# Altium PCB main board_PCB.PcbDoc
Units mm, origin at the board's own origin, x right, y up, seen from the top; angles counter-clockwise.
Board outline 152.4 x 101.6 mm, 2 copper layers (Top Layer, Bottom Layer); 106 components, 93 nets, 324 pads, 27 vias.
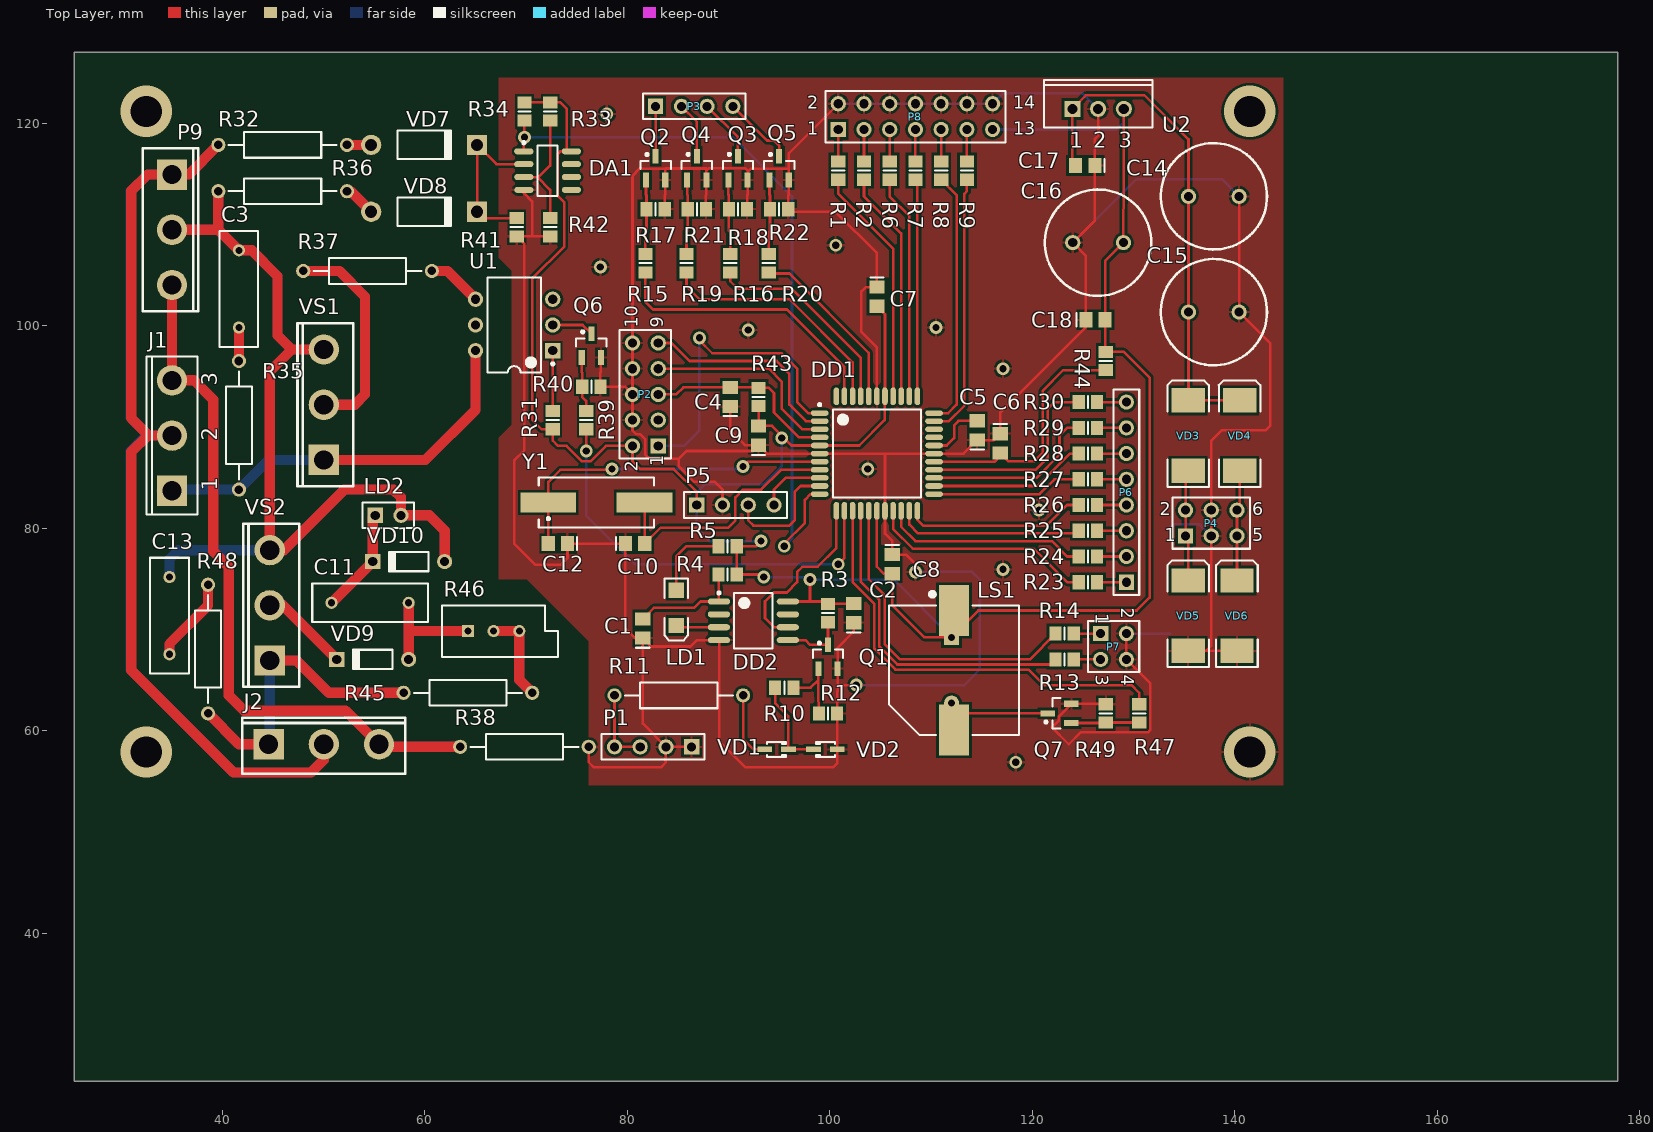
[diagram p0: Top Layer view]
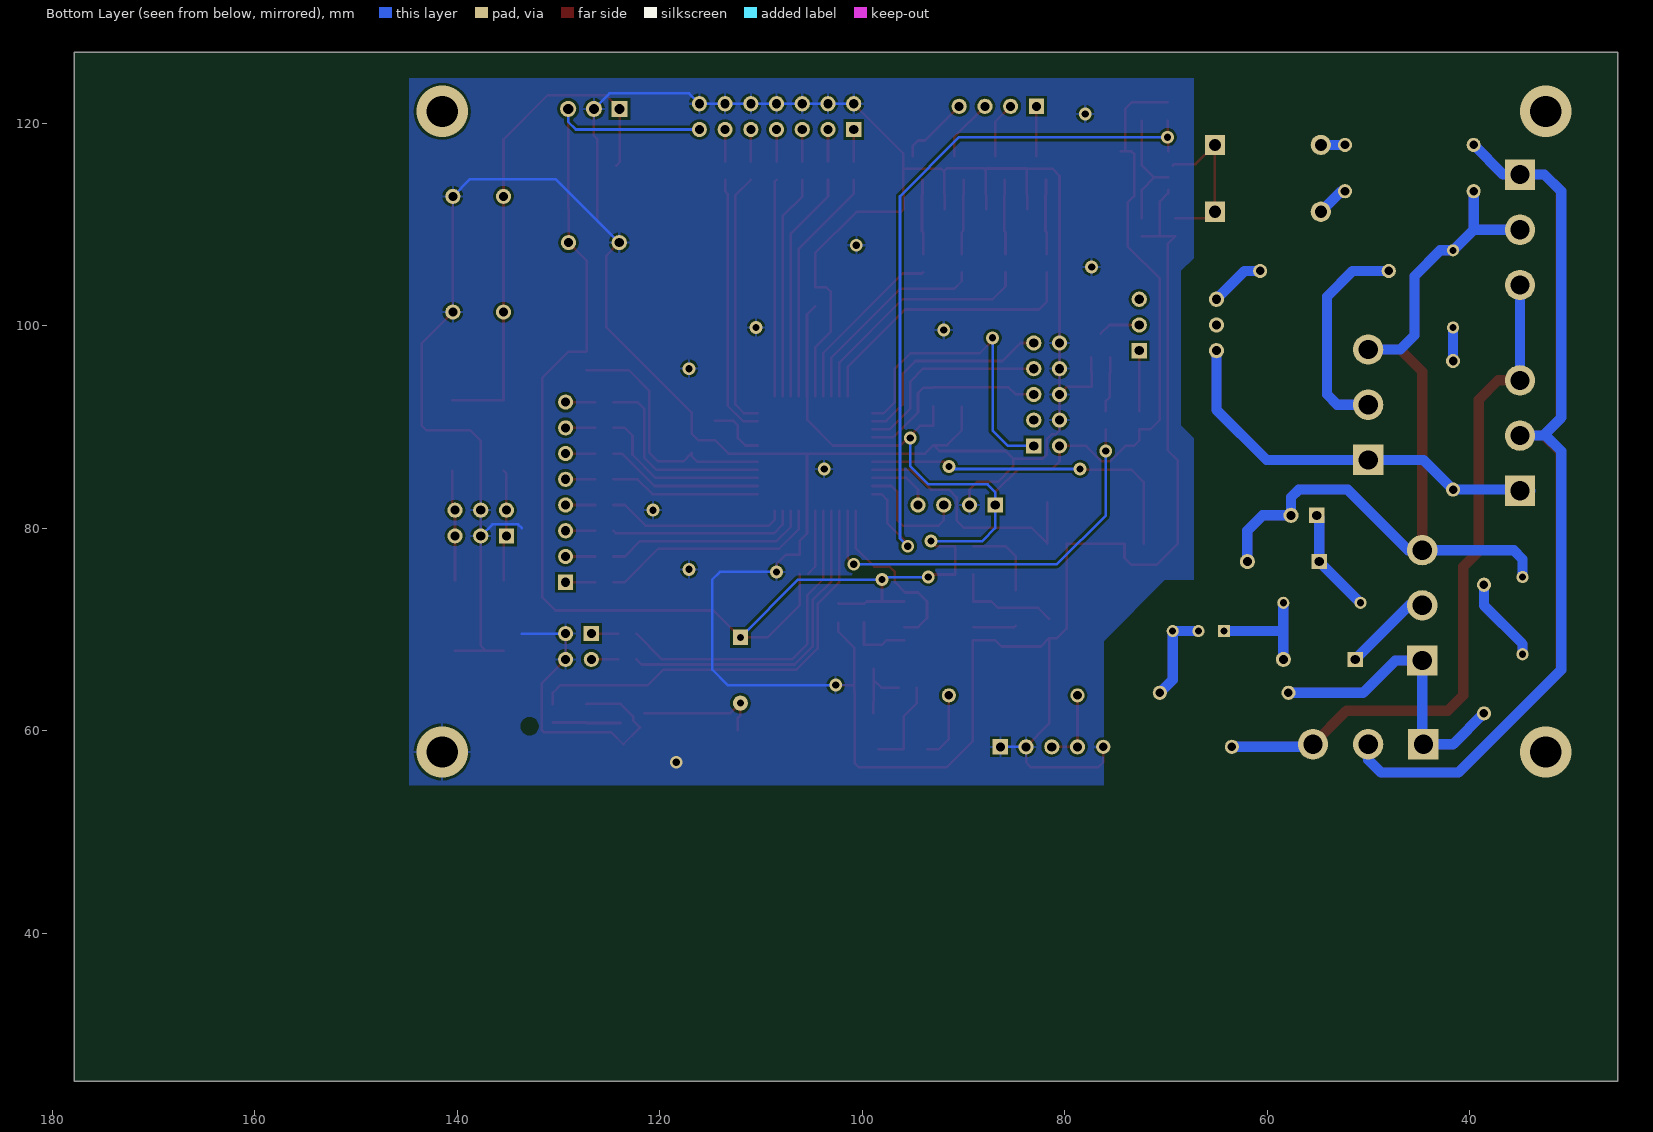
[diagram p1: Bottom Layer view, seen from below]

## Layer stack, top to bottom
Top Layer: signal copper 0.0356
Dielectric: dielectric 0.32, FR-4, Dk 4.8
Bottom Layer: signal copper 0.0356

## Board outline
25.4,25.4 177.8,25.4 177.8,127 25.4,127

## Design rules (kind name [scope] priority, off if disabled: settings)
Clearance [All] p1: gap=0.254
PolygonConnect [All] p1: connectstyle=Relief reliefconductorwidth=0.254 reliefentries=4 polygonreliefangle="90 Angle" airgapwidth=0.254
RoutingVias [All] p1: holewidth=0.711 width=1.27 viastyle="Through Hole" minholewidth=0.711 minwidth=1.27 maxholewidth=0.711 maxwidth=1.27
SilkscreenOverComponentPads [All] p1: minsilkscreentomaskgap=0.254
SolderMaskExpansion [All] p1: expansion=0.102
Width "Schematic Width Constraint_14" [InNet('NetR32_2')] p1: maxlimit=1.27 minlimit=0.254 preferedwidth=1.016 bottomlayer_maxwidth=1.016 minimp=50.000000 maximp=50.000000 favimp=50.000000
Width "Schematic Width Constraint_13" [InNet('NetR36_2')] p2: maxlimit=1.27 minlimit=0.254 preferedwidth=1.016 bottomlayer_maxwidth=1.016 minimp=50.000000 maximp=50.000000 favimp=50.000000
Width "Schematic Width Constraint_12" [InNet('NetVD9_2')] p3: maxlimit=1.27 minlimit=0.254 preferedwidth=1.016 bottomlayer_maxwidth=1.016 minimp=50.000000 maximp=50.000000 favimp=50.000000
Width "Schematic Width Constraint_11" [InNet('NetC3_2')] p4: maxlimit=1.27 minlimit=0.254 preferedwidth=1.016 bottomlayer_maxwidth=1.016 minimp=50.000000 maximp=50.000000 favimp=50.000000
Width "Schematic Width Constraint_10" [InNet('NetC11_1')] p5: maxlimit=1.27 minlimit=0.254 preferedwidth=1.016 bottomlayer_maxwidth=1.016 minimp=50.000000 maximp=50.000000 favimp=50.000000
Width "Schematic Width Constraint_9" [InNet('NetC11_2')] p6: maxlimit=1.27 minlimit=0.254 preferedwidth=1.016 bottomlayer_maxwidth=1.016 minimp=50.000000 maximp=50.000000 favimp=50.000000
Width "Schematic Width Constraint_8" [InNet('NetC13_2')] p7: maxlimit=1.27 minlimit=0.254 preferedwidth=1.016 bottomlayer_maxwidth=1.016 minimp=50.000000 maximp=50.000000 favimp=50.000000
Width "Schematic Width Constraint_7" [InNet('NetJ1_1')] p8: maxlimit=1.27 minlimit=0.254 preferedwidth=1.016 bottomlayer_maxwidth=1.016 minimp=50.000000 maximp=50.000000 favimp=50.000000
Width "Schematic Width Constraint_6" [InNet('NetJ1_3')] p9: maxlimit=1.27 minlimit=0.254 preferedwidth=1.016 bottomlayer_maxwidth=1.016 minimp=50.000000 maximp=50.000000 favimp=50.000000
Width "Schematic Width Constraint_5" [InNet('NetJ2_1')] p10: maxlimit=1.27 minlimit=0.254 preferedwidth=1.016 bottomlayer_maxwidth=1.016 minimp=50.000000 maximp=50.000000 favimp=50.000000
Width "Schematic Width Constraint_4" [InNet('NetR37_1')] p11: maxlimit=1.27 minlimit=0.254 preferedwidth=1.016 bottomlayer_maxwidth=1.016 minimp=50.000000 maximp=50.000000 favimp=50.000000
Width "Schematic Width Constraint_3" [InNet('NetR37_2')] p12: maxlimit=1.27 minlimit=0.254 preferedwidth=1.016 bottomlayer_maxwidth=1.016 minimp=50.000000 maximp=50.000000 favimp=50.000000
Width "Schematic Width Constraint_2" [InNet('NetR45_1')] p13: maxlimit=1.27 minlimit=0.254 preferedwidth=1.016 bottomlayer_maxwidth=1.016 minimp=50.000000 maximp=50.000000 favimp=50.000000
Width "Schematic Width Constraint_1" [InNet('AC_2')] p14: maxlimit=1.27 minlimit=0.254 preferedwidth=1.016 bottomlayer_maxwidth=1.016 minimp=50.000000 maximp=50.000000 favimp=50.000000
Width "Schematic Width Constraint" [InNet('AC_1')] p15: maxlimit=1.27 minlimit=0.254 preferedwidth=1.016 bottomlayer_maxwidth=1.016 minimp=50.000000 maximp=50.000000 favimp=50.000000
Width [All] p16: maxlimit=0.254 minlimit=0.254 preferedwidth=0.254
27 further rules are at their usual default settings.

## Components (designator, comment, footprint, x,y, rotation, side; value= is the part's Value field where it differs from the comment)
C1 "C0805" 0805 81.534,70.104 r90 top
C2 "C0805" 0805 102.362,71.628 r90 top
C3 "Cap" RAD-0.3 41.656,103.632 r270 top
C4 "C0805" 0805 90.17,92.964 r90 top
C5 "C0805" 0805 114.554,89.662 r90 top
C6 "C0805" 0805 116.84,88.392 r270 top
C7 "C0805" 0805 104.648,102.87 r270 top
C8 "C0805" 0805 106.172,76.454 r270 top
C9 "C0805" 0805 92.964,89.154 r90 top
C10 "C0805" 0805 80.772,78.486 r0 top
C11 "Cap" RAD-0.3 54.61,72.644 r0 top
C12 "C0805" 0805 73.152,78.486 r180 top
C13 "Cap" RAD-0.3 34.798,71.374 r270 top
C14 "Cap Pol1" RB5-10.5 137.922,112.776 r0 top
C15 "Cap Pol1" RB5-10.5 137.922,101.346 r0 top
C16 "Cap Pol1" RB5-10.5 126.492,108.204 r180 top
C17 "C0805" 0805 125.222,115.824 r180 top
C18 "C0805" 0805 126.238,100.584 r0 top
DA1 "LM393D" SO8_L 72.136,115.316 r0 top
DD1 "ATmega32A-AU" 44A_N 104.648,87.376 r0 top
DD2 "ATtiny25-20SU" 8S2_N 92.456,70.866 r0 top
J1 "Plug AC Female" SUPER-247 35.052,89.154 r90 top
J2 "Plug AC Female" Super-TO-247AC 50.038,58.674 r0 top
LD1 "LED2" 3.2X1.6X1.1 84.836,72.136 r270 top
LD2 "LED1" HDR1X2 55.118,81.28 r0 top
LS1 "Buzzer" ABSM-1574 112.268,71.882 r270 top
P1 "Header 4" HDR1X4 86.36,58.42 r180 top
P2 "Header 5X2" HDR2X5 83.058,88.138 r90 top
P3 "Header 4" HDR1X4 82.804,121.666 r0 top
P4 "Header 3X2" HDR2X3 135.128,79.248 r0 top
P5 "Header 4" HDR1X4 86.868,82.296 r0 top
P6 "Header 8" HDR1X8 129.286,74.676 r90 top
P7 "Header 2X2" HDR2X2 126.746,69.596 r270 top
P8 "Header 7X2" HDR2X7 100.838,119.38 r0 top
P9 "Plug AC Male" Super-TO-247AC 35.052,109.474 r270 top
Q1 "QNPN" SOT23_M 99.822,67.31 r90 top
Q2 "QNPN" SOT23_M 82.804,115.57 r90 top
Q3 "QNPN" SOT23_M 90.932,115.57 r90 top
Q4 "QNPN" SOT23_M 86.868,115.57 r90 top
Q5 "QNPN" SOT23_M 94.996,115.57 r90 top
Q6 "QNPN" SOT23_M 76.454,98.044 r90 top
Q7 "QNPN" SOT23_M 122.682,61.722 r180 top
R1 "Res2" 6-0805_N 100.838,115.316 r270 top
R2 "Res2" 6-0805_N 103.378,115.316 r270 top
R3 "Res2" 6-0805_N 99.822,71.628 r90 top
R4 "Res2" 6-0805_N 89.916,75.438 r0 top
R5 "Res2" 6-0805_N 89.916,78.232 r0 top
R6 "Res2" 6-0805_N 105.918,115.316 r270 top
R7 "Res2" 6-0805_N 108.458,115.316 r270 top
R8 "Res2" 6-0805_N 110.998,115.316 r270 top
R9 "Res2" 6-0805_N 113.538,115.316 r270 top
R10 "Res2" 6-0805_N 95.504,64.262 r0 top
R11 "Res Semi" AXIAL-0.5 85.09,63.5 r0 top
R12 "Res2" 6-0805_N 99.822,61.722 r180 top
R13 "Res2" 6-0805_N 123.19,67.056 r0 top
R14 "Res2" 6-0805_N 123.19,69.596 r0 top
R15 "Res2" 6-0805_N 81.788,106.172 r90 top
R16 "Res2" 6-0805_N 90.17,106.172 r90 top
R17 "Res2" 6-0805_N 82.804,111.506 r180 top
R18 "Res2" 6-0805_N 90.932,111.506 r180 top
R19 "Res2" 6-0805_N 85.852,106.172 r90 top
R20 "Res2" 6-0805_N 93.98,106.172 r90 top
R21 "Res2" 6-0805_N 86.868,111.506 r180 top
R22 "Res2" 6-0805_N 94.996,111.506 r180 top
R23 "Res2" 6-0805_N 125.476,74.676 r0 top
R24 "Res2" 6-0805_N 125.476,77.216 r0 top
R25 "Res2" 6-0805_N 125.476,79.756 r0 top
R26 "Res2" 6-0805_N 125.476,82.296 r0 top
R27 "Res2" 6-0805_N 125.476,84.836 r0 top
R28 "Res2" 6-0805_N 125.476,87.376 r0 top
R29 "Res2" 6-0805_N 125.476,89.916 r0 top
R30 "Res2" 6-0805_N 125.476,92.456 r0 top
R31 "Res2" 6-0805_N 72.644,90.678 r90 top
R32 "Res Semi" AXIAL-0.5 45.974,117.856 r0 top
R33 "Res2" 6-0805_N 72.39,121.158 r90 top
R34 "Res2" 6-0805_N 69.85,121.158 r90 top
R35 "Res Semi" AXIAL-0.5 41.656,90.17 r270 top
R36 "Res Semi" AXIAL-0.5 45.974,113.284 r0 top
R37 "Res Semi" AXIAL-0.5 54.356,105.41 r0 top
R38 "Res Semi" AXIAL-0.5 69.85,58.42 r180 top
R39 "Res2" 6-0805_N 75.946,90.678 r90 top
R40 "Res2" 6-0805_N 76.454,93.98 r180 top
R41 "Res2" 6-0805_N 69.088,109.728 r90 top
R42 "Res2" 6-0805_N 72.39,109.728 r90 top
R43 "Res2" 6-0805_N 92.964,92.964 r90 top
R44 "Res2" 6-0805_N 127.254,96.52 r90 top
R45 "Res Semi" AXIAL-0.5 64.262,63.754 r180 top
R46 "RPot" VR5 66.802,69.85 r0 top
R47 "Res2" 6-0805_N 130.556,61.722 r270 top
R48 "Res Semi" AXIAL-0.5 38.608,68.072 r270 top
R49 "Res2" 6-0805_N 127.254,61.722 r270 top
U1 "MOC3051" DIP-6 68.834,100.076 r180 top
U2 "µA7805CKC" KC03 126.492,121.412 r0 top
VD1 "BAS316" SOD-323 94.742,58.166 r0 top
VD2 "BAS316" SOD-323 99.568,58.166 r180 top
VD3 "ES3" SMC 135.382,89.154 r90 top
VD4 "ES3" SMC 140.462,89.154 r90 top
VD5 "ES3" SMC 135.382,71.374 r90 top
VD6 "ES3" SMC 140.208,71.374 r90 top
VD7 "SF16" DO-41 59.944,117.856 r0 top
VD8 "SF16" DO-41 59.944,111.252 r0 top
VD9 "Diode 1N4148" DO-35 54.864,67.056 r180 top
VD10 "Diode 1N4148" DO-35 58.42,76.708 r180 top
VS1 "SCR" Super-TO-247AC 50.038,92.202 r90 top
VS2 "SCR" Super-TO-247AC 44.704,72.39 r90 top
Y1 "HC49/4H_SMX" HC49/4H_SMX 76.962,82.55 r0 top

## Footprints (in the part's own frame and the unit in brackets; to place one, negate y for a bottom-side part, rotate by r counter-clockwise, add the part's x,y. Pads: shape width x height; smd on the part's side, far side on the other; paste and mask are expansions set on the pad)
3.2X1.6X1.1 [mm] "SMT LED; 2 Flat Leads"
  rect 1.5x1.5 smd: 1(-1.75,0) 2(1.75,0)
  silkscreen extent -2.9,-1.15 3.2,1.15
6-0805_N [mm] "Chip Resistor, Body 2.0x1.2mm, IPC Medium Density"
  rect 1.2x1.4 smd: 1(-0.9,0) 2(0.9,0)
  silkscreen extent 0,-0.6 0,0.6, body extent -1.07,-0.7 1.07,0.7, height 0.7
8S2_N [mm] "SOP, 8-Leads, Body 5.3x5.3mm, Pitch 1.27mm, IPC Medium Density"
  oval 2.2x0.6 smd: 1(-3.4,1.905) 2(-3.4,0.635) 3(-3.4,-0.635) 4(-3.4,-1.905) 5(3.4,-1.905) 6(3.4,-0.635) 7(3.4,0.635) 8(3.4,1.905)
  silkscreen extent -3.52,-2.75 1.9,2.88, body extent -2.73,-2.75 2.73,2.75, height 2.16
44A_N [mm] "Thin QFP, 44-Leads, Body 10x10mm, Pitch 0.8mm, IPC Medium Density"
  oval 1.75x0.55 smd: 1(-5.65,4) 2(-5.65,3.2) 3(-5.65,2.4) 4(-5.65,1.6) 5(-5.65,0.8) 6(-5.65,0) 7(-5.65,-0.8) 8(-5.65,-1.6) 9(-5.65,-2.4) 10(-5.65,-3.2) 11(-5.65,-4) 23(5.65,-4) 24(5.65,-3.2) 25(5.65,-2.4) 26(5.65,-1.6) 27(5.65,-0.8) 28(5.65,0) 29(5.65,0.8) 30(5.65,1.6) 31(5.65,2.4) 32(5.65,3.2) 33(5.65,4)
  oval 0.55x1.75 smd: 12(-4,-5.65) 13(-3.2,-5.65) 14(-2.4,-5.65) 15(-1.6,-5.65) 16(-0.8,-5.65) 17(0,-5.65) 18(0.8,-5.65) 19(1.6,-5.65) 20(2.4,-5.65) 21(3.2,-5.65) 22(4,-5.65) 34(4,5.65) 35(3.2,5.65) 36(2.4,5.65) 37(1.6,5.65) 38(0.8,5.65) 39(0,5.65) 40(-0.8,5.65) 41(-1.6,5.65) 42(-2.4,5.65) 43(-3.2,5.65) 44(-4,5.65)
  silkscreen extent -5.77,-4.35 4.35,4.95, body extent -5,-5 5,5, height 1.2
0805 [mm] "Chip Capacitor; Body 2.0 x 1.2 mm (LxW typ)"
  rect 1.3x1.5 smd: 1(-0.95,0) 2(0.95,0)
  silkscreen extent -1.9,-0.65 -1.9,0.65
ABSM-1574 [mm] "Magnetic Transducer Buzzer"
  rect 5x3 smd: 1(0,0) 2(11.8,0)
  rect 1.5x1.5 hole 0.7: 1A(2.65,-0.24)
  round 1.5 hole 0.7: 2A(9.15,-0.24)
  silkscreen extent -1.83,-6.4 12.3,6.4
AXIAL-0.5 [mm] "Axial Device, Thru-Hole; 2 Leads; 0.5 in Pin Spacing"
  round 1.4 hole 0.85: 1(-6.35,0) 2(6.35,0)
  silkscreen extent -5.33,-1.27 5.33,1.27
DIP-6 [mm] "DIP; 6 Leads; Row Spacing 7.62 mm; Pitch 2.54 mm"
  rect 1.5x1.5 hole 0.9: 1(-3.81,2.54)
  round 1.5 hole 0.9: 2(-3.81,0) 3(-3.81,-2.54) 4(3.81,-2.54) 5(3.81,0) 6(3.81,2.54)
  silkscreen extent -3.94,-4.7 2.65,4.7, body extent -3.55,-4.7 3.55,4.7, height 5.46
DO-35 [mm] "Diode, Axial; Body 3.8 x 1.9 mm (LxDia. max), Lead Dia. 0.53 mm (max)"
  round 1.5 hole 0.9: 1(-3.55,0)
  rect 1.5x1.5 hole 0.9: 2(3.55,0)
  silkscreen extent -1.95,-0.95 2.05,0.95
DO-41 [mm] "Diode, Axial; Body 5.2 x 2.7 mm (LxDia. max), Lead Dia. 0.86 mm (max)"
  round 2 hole 1.2: 1(-5.23,0)
  rect 2x2 hole 1.2: 2(5.23,0)
  silkscreen extent -2.65,-1.4 2.75,1.4
HC49/4H_SMX [mm] "Surface Mount Quartz Crystal; Body 13.4 (inc. leads) x 4.9 mm (LxW max)"
  rect 5.5x2 smd: 1(-4.75,0) 2(4.75,0)
  silkscreen extent -5.7,-2.45 5.7,2.45
HDR1X2 [mm] "Connector; Header; 2 Position"
  rect 1.5x1.5 hole 0.9: 1(0,0)
  round 1.5 hole 0.9: 2(2.54,0)
  silkscreen extent -1.27,-1.27 3.81,1.27
HDR1X4 [mm] "Connector; Header; 4 Position"
  rect 1.5x1.5 hole 0.9: 1(0,0)
  round 1.5 hole 0.9: 2(2.54,0) 3(5.08,0) 4(7.62,0)
  silkscreen extent -1.27,-1.27 8.89,1.27
HDR1X8 [mm] "Connector; Header; 8 Position"
  rect 1.5x1.5 hole 0.9: 1(0,0)
  round 1.5 hole 0.9: 2(2.54,0) 3(5.08,0) 4(7.62,0) 5(10.16,0) 6(12.7,0) 7(15.24,0) 8(17.78,0)
  silkscreen extent -1.27,-1.27 19.05,1.27
HDR2X2 [mm] "Connector; Header; 2x2 Position"
  rect 1.5x1.5 hole 0.9: 1(0,0)
  round 1.5 hole 0.9: 2(0,2.54) 3(2.54,0) 4(2.54,2.54)
  silkscreen extent -1.27,-1.27 3.81,3.81
HDR2X3 [mm] "Connector; Header; 3x2 Position"
  rect 1.5x1.5 hole 0.9: 1(0,0)
  round 1.5 hole 0.9: 2(0,2.54) 3(2.54,0) 4(2.54,2.54) 5(5.08,0) 6(5.08,2.54)
  silkscreen extent -1.27,-1.27 6.35,3.81
HDR2X5 [mm] "Connector; Header; 5x2 Position"
  rect 1.5x1.5 hole 0.9: 1(0,0)
  round 1.5 hole 0.9: 2(0,2.54) 3(2.54,0) 4(2.54,2.54) 5(5.08,0) 6(5.08,2.54) 7(7.62,0) 8(7.62,2.54) 9(10.16,0) 10(10.16,2.54)
  silkscreen extent -1.27,-1.27 11.43,3.81
HDR2X7 [mm] "Connector; Header; 7x2 Position"
  rect 1.5x1.5 hole 0.9: 1(0,0)
  round 1.5 hole 0.9: 2(0,2.54) 3(2.54,0) 4(2.54,2.54) 5(5.08,0) 6(5.08,2.54) 7(7.62,0) 8(7.62,2.54) 9(10.16,0) 10(10.16,2.54) 11(12.7,0) 12(12.7,2.54) 13(15.24,0) 14(15.24,2.54)
  silkscreen extent -1.27,-1.27 16.51,3.81
KC03 [mm] "TO, Thru-Hole, Vertical, Heatsink Mounted; 3 In-Line Leads; Pitch 2.54 mm"
  rect 1.6x1.6 hole 1: 1(-2.54,0)
  round 1.6 hole 1: 2(0,0) 3(2.54,0)
  silkscreen extent -5.35,-1.85 5.35,2.85
RAD-0.3 [mm] "Radial Cap, Thru-Hole; 2 Leads; 0.3 in Pin Spacing"
  round 1.2 hole 0.7: 1(-3.81,0) 2(3.81,0)
  silkscreen extent -5.71,-1.91 5.71,1.91
RB5-10.5 [mm] "Capacitor (Radial); 2 Leads"
  round 1.5 hole 0.9: 1(-2.5,0) 2(2.5,0)
  silkscreen extent -5.25,-5.25 5.25,5.25
SMC [mm] "DO-214-AB/SMC; 2 C-Bend Leads; Body 7.9 x 5.9 mm, inc. leads (LxW)"
  rect 2.4x3.3 smd: 1(-3.475,0) 2(3.475,0)
  silkscreen extent -5.08,-2.05 5.42,2.06
SO8_L [mm] "SOIC, 8-Leads, Body 4.9x3.9mm, Pitch 1.27mm, IPC High Density"
  oval 1.9x0.6 smd: 1(-2.35,1.905) 2(-2.35,0.635) 3(-2.35,-0.635) 4(-2.35,-1.905) 5(2.35,-1.905) 6(2.35,-0.635) 7(2.35,0.635) 8(2.35,1.905)
  silkscreen extent -2.47,-2.5 1,2.88, body extent -2,-2.5 2,2.5, height 1.75
SOD-323 [mm] "SOD-323/SC-76; 2 Leads; Body 1.7 x 1.3 mm, (LxW)"
  rect 1.45x0.55 smd: 1(1.175,0) 2(-1.175,0)
  silkscreen extent -0.95,-0.75 0.95,0.75
SOT23_M [mm] "SOT23, 3-Leads, Body 2.9x1.3mm, Pitch 0.95mm, Lead Span 2.3mm - Reverse Pinning, IPC Low Density"
  rect 1.45x0.6 smd: 1(1.175,0) 2(-1.175,-0.95) 3(-1.175,0.95)
  silkscreen extent -0.1,-1.5 1.47,1.5, body extent -0.7,-1.5 0.7,1.5, height 1.1
SUPER-247 [mm] "SIP; 3 Leads; Body 20.3 x 15.6 x 5 mm (typ); Pitch 5.45 mm"
  rect 3x3 hole 1.9: 1(-5.45,0)
  round 3 hole 1.9: 2(0,0) 3(5.45,0)
  silkscreen extent -7.8,-2.5 7.8,2.5
Super-TO-247AC [mm] "SIP; 3 Leads; Body 20.3 x 15.6 x 5 mm (typ); Pitch 5.45 mm"
  rect 3x3 hole 1.9: 1(-5.45,0)
  round 3 hole 1.9: 2(0,0) 3(5.45,0)
  silkscreen extent -8.05,-2.9 8.05,2.6
VR5 [mm] "Thru-Hole; 3 Leads"
  rect 1.2x1.2 hole 0.7: 1(-2.54,0)
  round 1.2 hole 0.7: 2(0,0) 3(2.54,0)
  silkscreen extent -5.08,-2.54 6.35,2.54

## Part data
C1 C2 C4 C5 C6 C7 C8 C9 C10 C12 C17 C18: "Ceramic Chip Capacitor - Standard"
C3 C11 C13: "Capacitor"
C14 C15 C16: "Polarized Capacitor (Radial)"
DA1: "Low-Power Dual Voltage Comparator"
DD1: "8-bit AVR Microcontroller, 32KB Flash, 1KB EEPROM, 2KB SRAM, 44-pin TQFP, Industrial Grade (-40°C to 85°C)"
DD2: "8-bit AVR Microcontroller, 2.7-5.5V, 2KB Flash, 128 Bytes EEPROM, 128 Bytes SRAM, 8-pin SOP, Industrial Grade (-40°C to 85°C), Pb-Free"
J1 J2: "IEC Mains Power Outlet, EN60 320-2-2 F Class I, PC Flange Rear Mount, Chassis Socket"
LD1: "Typical RED, GREEN, YELLOW, AMBER GaAs LED"
LD2: "Typical RED GaAs LED"
LS1: "Magnetic Transducer Buzzer"
P1 P3 P5: "Header, 4-Pin"
P2: "Header, 5-Pin, Dual row"
P4: "Header, 3-Pin, Dual row"
P6: "Header, 8-Pin"
P7: "Header, 2-Pin, Dual row"
P8: "Header, 7-Pin, Dual row"
P9: "IEC Mains Power Inlet, EN60 320-1 C14 Class I Cold Condition, PC Flange Rear Mount, Chassis Plug"
Q1 Q2 Q3 Q4 Q5 Q6 Q7: "NPN Bipolar Transistor"
R1 R2 R3 R4 R5 R6 R7 R8 R9 R10 R12 R13 R14 R15 R16 R17 R18 R19 R20 R21 R22 R23 R24 R25 R26 R27 R28 R29 R30 R31 R33 R34 R39 R40 R41 R42 R43 R44 R47 R49: "Resistor"
R11 R32 R35 R36 R37 R38 R45 R48: "Semiconductor Resistor"
R46: "Potentiometer"
U1: library part "SW DIP-3", "DIP Switch, 3 Position, SPST"
U2: "Positive-Voltage Regulator"
VD1 VD2 VD3 VD4 VD5 VD6: library part BA592, "Silicon RF Switching Diode for VHF Band Switching in TV/VTR Tuners"
VD7 VD8: library part "Diode 1N4001", "1 Amp General Purpose Rectifier"
VD9 VD10: "High Conductance Fast Diode"
VS1 VS2: "Silicon Controlled Rectifier"
Y1: "Surface Mount Quartz Crystal"

## Via types
v1: diameter 1.27, hole 0.711, Top Layer to Bottom Layer, 23 vias
v2: diameter 5.08, hole 3.1, Top Layer to Bottom Layer, 4 vias

## Nets (pads, with @x,y where several pads share a name; then routed paths per layer and width w, separated by ;. In a path a pad name is that pad's centre, name@x,y a point inside that pad or via, vN(x,y) a via of type N, cw(c..) or ccw(c..) an arc to the next point about the centre after c; other vN are vias at no path point)
A: DD1.19 R23.1 | length 22.3
  Top Layer w0.254: DD1.19 106.248,79.934 108.204,77.978 120.142,77.978 123.444,74.676 R23.1
AC_1: J1.2 J2.2 P9.1 R32.1 | length 173.8
  Top Layer w1.016: J1.2 32.766,89.154 ; R32.1 36.692,114.924 P9.1 32.628,114.924 31.038,113.334 31.038,90.882 32.766,89.154 ; J2.2 50.038,57.15 48.768,55.88 41.148,55.88 31.038,65.99 31.038,87.553 32.639,89.154 32.766,89.154
  Bottom Layer w1.016: J1.2 32.766,89.154 ; R32.1 36.692,114.924 P9.1 32.628,114.924 30.988,113.284 30.988,90.932 32.766,89.154 ; J2.2 50.038,57.15 48.768,55.88 41.148,55.88 30.988,66.04 30.988,87.63 32.512,89.154 32.766,89.154
AC_2: C3.1 C13.1 LD2.2 P9.2 R36.1 VD10.1 VS1.3 VS2.3 | length 138
  Top Layer w1.016: P9.2 39.624,109.474 ; R36.1 39.624,109.474 ; VS1.3 46.874,97.652 ; VD10.1 61.97,79.762 60.452,81.28 LD2.2 57.658,83.058 56.896,83.82 52.07,83.82 46.09,77.84 VS2.3 44.704,95.482 46.874,97.652 ; 39.624,109.474 C3.1 42.926,107.442 45.466,104.902 45.466,99.06 46.874,97.652
  Bottom Layer w1.016: C13.1 34.798,76.962 35.676,77.84 VS2.3 46.09,77.84 52.07,83.82 56.896,83.82 57.658,83.058 LD2.2 60.452,81.28 61.97,79.762 VD10.1 ; P9.2 39.624,109.474 ; R36.1 39.624,109.474 ; VS1.3 46.874,97.652 45.466,99.06 45.466,104.902 42.926,107.442 C3.1 39.624,109.474
AREF: C5.2 DD1.29 | length 6
  Top Layer w0.254: DD1.29 111.544,88.176 112.268,88.9 112.268,90.17 112.71,90.612 C5.2
AVCC: C6.2 DD1.27 R44.1 | length 25.1
  Top Layer w0.254: DD1.27 116.294,86.576 116.84,87.122 C6.2 117.668,86.614 120.142,86.614 121.031,87.503 121.031,93.599 123.052,95.62 R44.1
B: DD1.20 R24.1 | length 20.3
  Top Layer w0.254: DD1.20 107.048,80.15 108.458,78.74 121.92,78.74 123.444,77.216 R24.1
BEEP_ON: DD1.14 R47.1 | length 43.6
  Top Layer w0.254: DD1.14 102.248,74.676 104.394,72.53 104.394,68.116 106.47,66.04 119.634,66.04 121.158,64.516 129.794,64.516 130.556,63.754 R47.1
BUT1: P8.11 R9.1 | length 3.2
  Top Layer w0.254: R9.1 P8.11
BUT2: P8.9 R8.1 | length 3.2
  Top Layer w0.254: R8.1 P8.9
BUT3: P8.7 R7.1 | length 3.2
  Top Layer w0.254: R7.1 P8.7
BUT4: P8.5 R6.1 | length 3.2
  Top Layer w0.254: R6.1 P8.5
BUT5: P8.3 R2.1 | length 3.2
  Top Layer w0.254: R2.1 P8.3
BUT6: P8.1 R1.1 | length 3.2
  Top Layer w0.254: R1.1 P8.1
C: DD1.21 R25.1 | length 18.6
  Top Layer w0.254: DD1.21 107.848,80.366 108.712,79.502 124.322,79.502 R25.1
D: DD1.22 R26.1 | length 17.9
  Top Layer w0.254: DD1.22 108.648,80.836 109.22,80.264 121.412,80.264 123.444,82.296 R26.1
DP: DD1.26 R30.1 | length 19.9
  Top Layer w0.254: DD1.26 120.32,85.776 121.539,86.995 121.539,91.821 122.174,92.456 R30.1
E: DD1.23 R27.1 | length 14.9
  Top Layer w0.254: DD1.23 120.714,83.376 122.174,84.836 R27.1
F: DD1.24 R28.1 | length 15.6
  Top Layer w0.254: DD1.24 120.498,84.176 123.698,87.376 R28.1
G: DD1.25 R29.1 | length 17.4
  Top Layer w0.254: DD1.25 120.396,84.976 122.682,87.262 122.682,89.154 123.444,89.916 R29.1
GND: C1.1 C2.1 C4.1 C5.1 C6.1 C7.1 C8.1 C9.1 C10.1 C12.1 C14.2 C15.2 C16.2 C17.1 C18.1 DA1.4 DD1.6 DD1.18 DD1.28 DD1.39 DD2.4 P1.1 P1.2 P2.4 P2.6 P2.8 P2.10 P4.3 P4.4 P5.2 P7.2 P7.4 P8.2 P8.4 P8.6 P8.8 P8.10 P8.12 P8.14 Q1.2 Q2.2 Q3.2 Q4.2 Q5.2 Q6.2 Q7.2 R12.1 R17.1 R18.1 R21.1 R22.1 R38.1 R40.1 R41.1 R42.1 R49.1 U2.2 VD2.2 VD5.1 VD6.1 | length 509.4
  Top Layer w0.254: DA1.4 69.786,113.094 70.612,112.268 70.612,108.828 ; R42.1 70.612,108.828 ; R38.1 76.2,56.896 76.708,56.388 83.312,56.388 83.82,56.896 P1.2 ; Q6.2 77.404,95.427 77.354,95.377 R40.1 79.756,93.98 P2.6 ; R17.1 83.704,112.903 83.754,112.953 Q2.2 83.754,115.454 ; P1.1 P1.2 ; R21.1 87.768,112.903 87.818,112.953 Q4.2 87.818,115.316 ; P5.2 89.408,83.82 88.646,84.582 86.614,84.582 85.09,86.106 85.09,86.868 ; C4.1 90.17,89.662 91.628,88.204 C9.1 ; R18.1 91.832,112.903 91.882,112.953 Q3.2 91.882,115.199 ; P8.2 95.946,117.028 95.946,115.519 ; C2.1 102.362,69.784 100.772,68.194 Q1.2 100.772,64.516 ; v1(102.616,64.516) 100.772,64.516 ; DD1.39 104.648,97.872 103.124,99.396 103.124,103.378 103.566,103.82 C7.1 104.648,107.188 100.584,111.252 96.15,111.252 R22.1 95.896,112.903 95.946,112.953 Q5.2 95.946,115.519 ; 105.448,87.338 DD1.18 105.448,79.464 106.172,78.74 C8.1 107.508,77.404 108.458,76.454 v1(108.458,75.692) ; U2.2 126.492,118.76 126.172,118.44 C17.1 126.172,110.384 C16.2 125.288,106.908 C18.1 125.288,99.888 116.84,91.44 C6.1 116.21,88.712 C5.1 113.218,87.376 DD1.28 DD1.6 93.792,87.376 C9.1 ; R49.1 127.204,62.672 Q7.2 122.613,61.428 122.613,61.041 121.92,60.348 123.594,58.674 124.761,59.841 131.414,59.841 131.637,60.064 131.637,64.705 P7.4 P7.2 ; VD5.1 137.16,67.899 ; VD6.1 137.16,67.899 ; C14.2 C15.2 143.51,98.258 143.51,90.17 143.002,89.662 138.684,89.662 137.668,88.646 P4.4 P4.3 137.668,68.407 137.16,67.899 ; 70.612,108.828 R41.1 69.85,108.066 69.85,87.706 68.834,86.69 68.834,78.486 70.932,76.388 73.406,76.388 74.102,77.084 C12.1 C10.1 79.822,70.104 80.772,69.154 C1.1 ; P2.6 P2.8 P2.10 80.518,114.808 81.229,115.519 83.754,115.519 83.754,115.454 ; P2.6 P2.4 80.518,89.662 80.911,89.269 81.292,89.269 81.788,88.773 81.788,87.254 82.174,86.868 85.09,86.868 ; C1.1 81.534,60.706 P1.2 ; C1.1 82.362,68.326 86.233,68.326 86.868,68.961 DD2.4 89.078,68.961 89.078,59.004 91.694,56.388 100.33,56.388 100.743,56.801 VD2.2 100.743,59.919 100.722,59.94 R12.1 100.722,63.881 100.772,63.931 100.772,64.516 ; 83.754,115.454 83.822,115.522 87.818,115.522 87.818,115.316 ; 85.09,86.868 85.852,87.63 92.39,87.63 C9.1 ; 87.818,115.316 88.072,115.57 91.628,115.57 91.882,115.316 91.882,115.199 ; 91.882,115.199 92.202,115.519 95.946,115.519
  Bottom Layer w0.254: P1.2 P1.1 ; P8.2 P8.4 P8.6 P8.8 P8.10 P8.12 P8.14 117.094,122.936 124.968,122.936 U2.2 ; v1(102.616,64.516) 113.284,64.516 114.808,66.04 114.808,74.93 114.046,75.692 v1(108.458,75.692) ; C16.2 130.266,114.478 138.72,114.478 C14.2 ; P7.2 133.604,69.596 ; 133.604,80.01 133.985,80.391 136.525,80.391 P4.3
  other v1: 118.364,56.896 117.094,75.946 120.65,81.788 103.751,85.852 117.094,95.758 91.948,99.568 110.49,99.822 77.343,105.791 100.584,107.95 77.978,120.904
  other v2: 141.478,57.912
LD1: P7.1 R14.2 | length 2.7
  Top Layer w0.254: R14.2 P7.1
LD2: P7.3 R13.2 | length 2.7
  Top Layer w0.254: R13.2 P7.3
LIN_IN: DA1.1 DD1.11 R34.1 | length 73.8
  Top Layer w0.254: DA1.1 v1@69.786,118.618 ; v1@69.85,118.682 R34.1 ; v1(95.504,78.232) 95.504,78.486 97.536,80.518 97.536,82.804 98.108,83.376 DD1.11
  Bottom Layer w0.254: v1(69.85,118.618) 90.424,118.618 96.266,112.776 96.266,78.994 v1(95.504,78.232)
NetC1_2: C1.2 DD2.1 R4.1 | length 10.9
  Top Layer w0.254: C1.2 82.616,72.136 86.614,72.136 87.249,72.771 DD2.1 89.056,74.066 89.016,74.106 R4.1
NetC3_2: C3.2 R35.1 | length 6.6
  Top Layer w1.016: R35.1 C3.2
  Bottom Layer w1.016: R35.1 C3.2
NetC11_1: C11.1 LD2.1 VD10.2 | length 20.9
  Top Layer w1.016: C11.1 50.806,72.644 VD10.2 54.87,81.032 LD2.1
  Bottom Layer w1.016: C11.1 50.806,72.644 VD10.2 54.87,81.032 LD2.1
NetC11_2: C11.2 R46.1 VD9.1 | length 22.9
  Top Layer w1.016: VD9.1 58.414,69.847 ; C11.2 58.414,72.638 58.414,69.847 ; R46.1 58.417,69.85 58.414,69.847
  Bottom Layer w1.016: VD9.1 58.42,67.062 58.42,69.853 ; C11.2 58.42,69.853 ; R46.1 58.423,69.85 58.42,69.853
NetC13_2: C13.2 R48.1 | length 16.9
  Top Layer w1.016: C13.2 34.798,68.58 38.608,72.39 R48.1
  Bottom Layer w1.016: C13.2 34.798,68.58 38.608,72.39 R48.1
NetDA1_2: DA1.2 R41.2 VD7.2 VD8.2 | length 15.8
  Top Layer w0.254: R41.2 65.798,110.628 VD8.2 VD7.2 67.079,115.951 69.215,115.951 DA1.2@69.342,115.824
NetDA1_3: DA1.3 R33.1 R42.2 | length 12.1
  Top Layer w0.254: DA1.3 71.12,114.681 ; R42.2 72.39,113.411 71.12,114.681 ; R33.1 72.39,115.824 71.247,114.681 71.12,114.681
NetDD1_15: DD1.15 R13.1 | length 32.5
  Top Layer w0.254: DD1.15 103.048,74.752 104.902,72.898 104.902,68.326 106.68,66.548 121.782,66.548 R13.1
NetDD1_16: DD1.16 R14.1 | length 32.4
  Top Layer w0.254: DD1.16 103.848,74.968 105.41,73.406 105.41,68.58 106.934,67.056 119.75,67.056 R14.1
NetDD1_32: DD1.32 R9.2 | length 26
  Top Layer w0.254: DD1.32 111.76,90.576 113.284,92.1 113.284,113.03 113.538,113.284 R9.2
NetDD1_33: DD1.33 R8.2 | length 25.4
  Top Layer w0.254: DD1.33 111.696,91.376 112.522,92.202 112.522,112.892 R8.2
NetDD1_34: DD1.34 R7.2 | length 21.5
  Top Layer w0.254: R7.2 108.648,114.226 DD1.34
NetDD1_35: DD1.35 R6.2 | length 22.2
  Top Layer w0.254: R6.2 105.918,112.776 107.848,110.846 DD1.35
NetDD1_36: DD1.36 R2.2 | length 22.9
  Top Layer w0.254: R2.2 103.378,112.776 107.048,109.106 DD1.36
NetDD1_37: DD1.37 R1.2 | length 23.6
  Top Layer w0.254: R1.2 100.838,113.03 106.248,107.62 DD1.37
NetDD2_3: DD2.3 LD1.2 | length 4.3
  Top Layer w0.254: LD1.2 84.991,70.231 DD2.3
NetDD2_5: DD2.5 Q1.1 R3.1 | length 6.4
  Top Layer w0.254: DD2.5 97.587,68.961 98.063,68.485 Q1.1 R3.1
NetJ1_1: J1.1 R35.2 U1.6 VS1.1 | length 63
  Top Layer w1.016: VS1.1 60.082,86.752 65.024,91.694 U1.6
  Bottom Layer w1.016: J1.1@34.036,83.704 34.152,83.82 R35.2 44.588,86.752 VS1.1 60.082,86.752 65.024,91.694 U1.6
NetJ1_3: J1.3 J2.3 P9.3 R38.2 | length 86.6
  Top Layer w1.016: P9.3 J1.3 37.222,94.604 39.116,92.71 39.116,77.724 40.64,76.2 40.64,63.5 42.164,61.976 52.186,61.976 J2.3 55.742,58.42 R38.2
  Bottom Layer w1.016: J1.3 P9.3 ; J2.3 55.742,58.42 R38.2
NetJ2_1: J2.1 R45.2 R48.2 VS2.1 | length 51.9
  Top Layer w1.016: R48.2 41.656,58.674 J2.1 ; VS2.1 47.36,66.94 50.546,63.754 R45.2
  Bottom Layer w0.254: J2.1 J2.1@44.704,58.79
  Bottom Layer w1.016: R48.2 41.656,58.674 J2.1 ; J2.1@44.704,58.79 VS2.1 47.36,66.94 50.546,63.754 R45.2
NetLD1_1: LD1.1 R5.1 | length 7.9
  Top Layer w0.254: LD1.1 84.836,77.216 85.852,78.232 R5.1
NetLS1_2: LS1.2 LS1.2A Q7.1 | length 12.6
  Top Layer w0.254: LS1.2 112.268,61.265 112.028,61.505 LS1.2A 113.038,61.722 Q7.1
NetP1_3: P1.3 P1.4 R11.1 | length 7.6
  Top Layer w0.254: R11.1 P1.4 P1.3
NetP3_1: P3.1 Q2.1 | length 4.9
  Top Layer w0.254: Q2.1 P3.1
NetP3_2: P3.2 Q4.1 | length 5.6
  Top Layer w0.254: P3.2 86.868,120.142 Q4.1
NetP3_3: P3.3 Q3.1 | length 6.2
  Top Layer w0.254: P3.3 90.932,118.618 Q3.1
NetP3_4: P3.4 Q5.1 | length 7.2
  Top Layer w0.254: P3.4 93.802,118.288 94.488,118.288 94.996,117.78 Q5.1
NetP4_1: P4.1 P4.2 VD3.1 VD5.2 | length 11
  Top Layer w0.254: VD5.2 135.382,78.994 P4.1 P4.2 135.128,85.425 VD3.1
NetP4_5: P4.5 P4.6 VD4.1 VD6.2 | length 10.9
  Top Layer w0.254: VD6.2 P4.5 P4.6 140.462,82.042 VD4.1
NetP6_1: P6.1 R23.2 | length 2.9
  Top Layer w0.254: R23.2 P6.1
NetP6_2: P6.2 R24.2 | length 2.9
  Top Layer w0.254: R24.2 P6.2
NetP6_3: P6.3 R25.2 | length 2.9
  Top Layer w0.254: R25.2 P6.3
NetP6_4: P6.4 R26.2 | length 2.9
  Top Layer w0.254: R26.2 P6.4
NetP6_5: P6.5 R27.2 | length 2.9
  Top Layer w0.254: R27.2 P6.5
NetP6_6: P6.6 R28.2 | length 2.9
  Top Layer w0.254: R28.2 P6.6
NetP6_7: P6.7 R29.2 | length 2.9
  Top Layer w0.254: R29.2 P6.7
NetP6_8: P6.8 R30.2 | length 2.9
  Top Layer w0.254: R30.2 P6.8
NetQ1_2: Q1.3 R10.2 R12.2 | length 7.2
  Top Layer w0.254: R10.2 98.11,64.262 98.872,65.024 ; Q1.3 98.872,65.024 ; R12.2 98.872,63.931 98.872,65.024
NetQ2_2: Q2.3 R15.2 R17.2 | length 7.4
  Top Layer w0.254: R15.2 81.788,109.22 81.904,109.336 R17.2 81.904,112.903 81.854,112.953 Q2.3
NetQ3_2: Q3.3 R16.2 R18.2 | length 7.4
  Top Layer w0.254: Q3.3 89.982,112.953 90.032,112.903 R18.2 90.032,109.358 90.17,109.22 R16.2
NetQ4_2: Q4.3 R19.2 R21.2 | length 7.4
  Top Layer w0.254: R19.2 85.852,109.22 85.968,109.336 R21.2 85.968,112.903 85.918,112.953 Q4.3
NetQ5_2: Q5.3 R20.2 R22.2 | length 7.4
  Top Layer w0.254: R20.2 93.98,109.22 94.096,109.336 R22.2 94.096,112.903 94.046,112.953 Q5.3
NetQ6_1: Q6.1 U1.2 | length 4.2
  Top Layer w0.254: U1.2 75.597,100.076 Q6.1
NetQ6_2: Q6.3 R39.2 R40.2 | length 5.5
  Top Layer w0.254: Q6.3 75.504,95.427 75.554,95.377 R40.2 75.554,92.975 75.946,92.583 R39.2
NetQ7_2: Q7.3 R47.2 R49.2 | length 6.7
  Top Layer w0.254: Q7.3 127.204,60.772 R49.2 R47.2
NetR10_1: R10.1 VD1.1 VD2.1 | length 9.1
  Top Layer w0.254: R10.1 94.604,62.738 95.917,61.425 VD1.1 VD2.1
NetR11_2: R11.2 VD1.2 | length 6.9
  Top Layer w0.254: R11.2 91.44,59.182 92.456,58.166 VD1.2
NetR31_2: R31.2 U1.1 | length 6
  Top Layer w0.254: R31.2 U1.1
NetR32_2: R32.2 VD7.1 | length 4.8
  Top Layer w1.016: R32.2 VD7.1
  Bottom Layer w1.016: R32.2 VD7.1
NetR36_2: R36.2 VD8.1 | length 6.5
  Top Layer w1.016: R36.2 52.682,113.284 VD8.1
  Bottom Layer w1.016: R36.2 52.682,113.284 VD8.1
NetR37_1: R37.1 VS1.2 | length 42.6
  Top Layer w1.016: R37.1 51.562,105.41 54.102,102.87 54.102,93.218 53.086,92.202 VS1.2
  Bottom Layer w1.016: R37.1 51.562,105.41 54.102,102.87 54.102,93.218 53.086,92.202 VS1.2
NetR37_2: R37.2 U1.4 | length 11
  Top Layer w1.016: R37.2 62.23,105.41 U1.4
  Bottom Layer w1.016: R37.2 62.23,105.41 U1.4
NetR45_1: R45.1 R46.2 R46.3 | length 18.3
  Top Layer w1.016: R46.2 R46.3 69.342,65.024 R45.1
  Bottom Layer w1.016: R46.2 R46.3 69.342,65.024 R45.1
NetVD9_2: VD9.2 VS2.2 | length 17.6
  Top Layer w1.016: VS2.2 45.98,72.39 VD9.2
  Bottom Layer w1.016: VS2.2 45.98,72.39 VD9.2
ON_MOT: DD1.13 R39.1 | length 40.9
  Top Layer w0.254: v1(75.946,87.63) R39.1 ; v1(100.838,76.454) 101.448,77.064 DD1.13
  Bottom Layer w0.254: v1(75.946,87.63) 75.946,81.28 80.772,76.454 v1(100.838,76.454)
PDI: DD1.1 P2.1 | length 30.9
  Top Layer w0.254: v1(87.122,98.806) 87.122,98.552 88.392,97.282 95.25,97.282 96.774,95.758 96.774,92.456 97.854,91.376 DD1.1
  Bottom Layer w0.254: P2.1 85.598,88.138 87.122,89.662 v1(87.122,98.806)
PDO: DD1.2 P2.9 | length 20.9
  Top Layer w0.254: P2.9 84.369,98.298 86.147,96.52 94.742,96.52 96.012,95.25 96.012,92.202 97.638,90.576 DD1.2
RES: C4.2 DD1.4 P2.5 R43.2 | length 19.4
  Top Layer w0.254: P2.5 84.836,93.218 85.532,93.914 C4.2 92.914,93.914 R43.2 93.98,93.864 94.488,93.356 94.488,91.44 96.952,88.976 DD1.4
RXD: DD1.9 P5.4 | length 6.5
  Top Layer w0.254: P5.4 94.488,83.82 95.644,84.976 DD1.9
SCK: DD1.3 P2.7 | length 20
  Top Layer w0.254: P2.7 93.98,95.758 95.25,94.488 95.25,91.808 97.282,89.776 DD1.3
SEG_0: DD1.40 R20.1 | length 17.5
  Top Layer w0.254: R20.1 94.096,105.156 96.012,105.156 103.848,97.32 DD1.40
SEG_1: DD1.41 R16.1 | length 20.7
  Top Layer w0.254: R16.1 90.17,104.394 90.932,103.632 96.266,103.632 103.048,96.85 DD1.41
SEG_2: DD1.42 R19.1 | length 24.2
  Top Layer w0.254: R19.1 85.852,103.886 87.122,102.616 96.012,102.616 102.248,96.38 DD1.42
SEG_3: DD1.43 R15.1 | length 28.1
  Top Layer w0.254: R15.1 81.788,102.362 82.55,101.6 95.758,101.6 101.448,95.91 DD1.43
TAH_IN: DD1.12 DD2.6 | length 17.8
  Top Layer w0.254: DD2.6 94.488,70.231 93.599,71.12 93.599,72.778 94.481,73.66 95.758,73.66 96.774,74.676 96.774,75.692 97.282,76.2 98.806,76.2 100.648,78.042 DD1.12
TXD: DD1.10 P5.3 | length 12
  Top Layer w0.254: P5.3 91.948,80.772 92.456,80.264 96.012,80.264 96.52,80.772 96.52,83.566 97.13,84.176 DD1.10
VCC: C2.2 C7.2 C8.2 C9.2 C16.1 C18.2 DA1.8 DD1.5 DD1.17 DD1.38 DD2.8 LS1.1 LS1.1A P2.2 P5.1 P8.13 R3.2 R4.2 R5.2 R31.1 R33.2 R34.2 R43.1 R44.2 U2.3 | length 253.9
  Top Layer w0.254: R34.2 R33.2 73.395,122.058 74.041,121.412 DA1.8@74.041,117.221 ; DA1.8 DA1.8@74.041,117.221 ; P5.1 86.868,83.566 84.582,85.852 81.28,85.852 80.518,86.614 P2.2 77.891,88.138 76.367,86.614 75.525,86.614 74.001,88.138 73.152,88.138 72.644,88.646 R31.1 71.552,89.778 70.612,90.718 70.612,104.648 73.787,107.823 73.787,112.166 73.152,112.801 73.152,116.967 73.406,117.221 DA1.8@74.041,117.221 ; R43.1 C9.2 94.3,90.104 96.228,88.176 DD1.5 102.908,88.176 105.41,90.678 105.41,92.988 DD1.38 105.448,101.12 C7.2 ; v1(93.218,78.74) 92.71,78.232 R5.2 R4.2 v1@93.472,75.438 ; DD2.8 98.044,72.771 ; v1(98.044,74.93) 98.044,72.771 ; C2.2 102.312,72.528 R3.2 99.579,72.771 98.044,72.771 ; DD1.17 104.648,76.2 105.344,75.504 ; C8.2 106.172,72.39 109.33,69.232 LS1.1A 114.678,71.882 130.302,71.882 131.572,73.152 131.572,94.88 129.032,97.42 R44.2 127.188,97.486 C18.2 127.188,106.4 C16.1 129.032,114.848 U2.3
  Bottom Layer w0.254: v1(93.218,78.74) 88.138,78.74 86.868,80.01 P5.1 86.868,83.566 87.63,84.328 93.472,84.328 95.25,86.106 v1(95.25,88.9) ; v1(93.472,75.184) 97.79,75.184 v1(98.044,74.93) 106.33,74.93 LS1.1A ; P8.13 128.27,119.38 129.032,120.142 U2.3
VCC+10V: C14.1 C15.1 C17.2 U2.1 VD3.2 VD4.2 | length 50.4
  Top Layer w0.254: C17.2 123.952,116.144 U2.1 125.298,122.758 131.064,122.758 135.422,118.4 C14.1 C15.1 135.422,92.669 VD3.2 VD4.2
XTL1: C10.2 DD1.8 Y1.2 | length 25.7
  Top Layer w0.254: Y1.2 81.712,80.503 81.722,80.493 C10.2 83.31,80.073 89.98,80.073 90.678,80.772 90.678,83.058 91.44,83.82 93.218,83.82 95.174,85.776 DD1.8
XTL2: C12.2 DD1.7 Y1.1 | length 33.7
  Top Layer w0.254: C12.2 72.202,84.582 73.386,85.766 78.4,85.766 v1(78.486,85.852) ; v1(91.44,86.106) 91.91,86.576 DD1.7
  Bottom Layer w0.254: v1(78.486,85.852) 91.186,85.852 v1(91.44,86.106)
pads on no net: DA1.5 DA1.6 DA1.7 DD1.30 DD1.31 DD1.44 DD2.2 DD2.7 P2.3 U1.3 U1.5
copper on no net:
  other v2: 32.512,57.912 32.512,121.158 141.478,121.158

## Polygon pours and split planes (outlines as drawn)
GND on Bottom Layer "Top Layer-No Net 1" (solid, pour order 7): 69.615,75.429 76.453,68.571 76.727,68.571 76.727,75.112 76.453,75.386
GND on Bottom Layer "Top Layer-No Net" (solid, pour order 5): 76.153,54.61 76.153,74.93 67.263,74.93 67.263,87.63 67.263,88.9 68.533,90.17 68.533,105.41 67.263,106.68 67.263,124.46 144.733,124.46 144.733,54.61
GND on Top Layer "Top Layer-No Net 1" (solid, pour order 6): 69.596,75.438 76.434,68.58 76.708,68.58 76.708,75.12 76.434,75.395
GND on Top Layer "Top Layer-No Net" (solid, remove dead copper, pour order 8): 76.191,54.645 76.191,74.965 67.301,74.965 67.301,88.935 68.571,90.205 68.571,105.445 67.301,106.715 67.301,124.495 144.771,124.495 144.771,54.645

## Text inside footprints (layer, text, board x,y; h text height)
J1: Top Overlay "3" at 39.532,94.096 h1.5 r90; Top Overlay "2" at 39.532,88.646 h1.5 r90; Top Overlay "1" at 39.532,83.704 h1.5 r90
P2: Top Overlay "10" at 81.026,99.822 h1.27 r90; Top Overlay "9" at 83.566,99.822 h1.27 r90; Top Overlay "1" at 83.566,86.106 h1.27 r90; Top Overlay "2" at 81.026,85.598 h1.27 r90
P4: Top Overlay "6" at 141.732,81.28 h1.27; Top Overlay "5" at 141.732,78.74 h1.27; Top Overlay "2" at 132.588,81.28 h1.27; Top Overlay "1" at 133.096,78.74 h1.27
P7: Top Overlay "1" at 126.238,71.628 h1.27 r270; Top Overlay "2" at 128.778,72.136 h1.27 r270; Top Overlay "4" at 128.778,65.532 h1.27 r270; Top Overlay "3" at 126.238,65.532 h1.27 r270
P8: Top Overlay "2" at 97.79,121.412 h1.27; Top Overlay "1" at 97.79,118.872 h1.27; Top Overlay "14" at 118.11,121.412 h1.27; Top Overlay "13" at 118.11,118.872 h1.27
U2: Top Overlay "2" at 125.992,117.587 h1.5; Top Overlay "1" at 123.702,117.587 h1.5; Top Overlay "3" at 128.532,117.587 h1.5